# Altium PCB MungBeanSprout_Pcb.PcbDoc
Units mil, origin at the board's own origin, x right, y up, seen from the top; angles counter-clockwise.
Board outline 600 x 708.66 mil, 2 copper layers (Top Layer, Bottom Layer); 14 components, 20 nets, 59 pads, 11 vias.
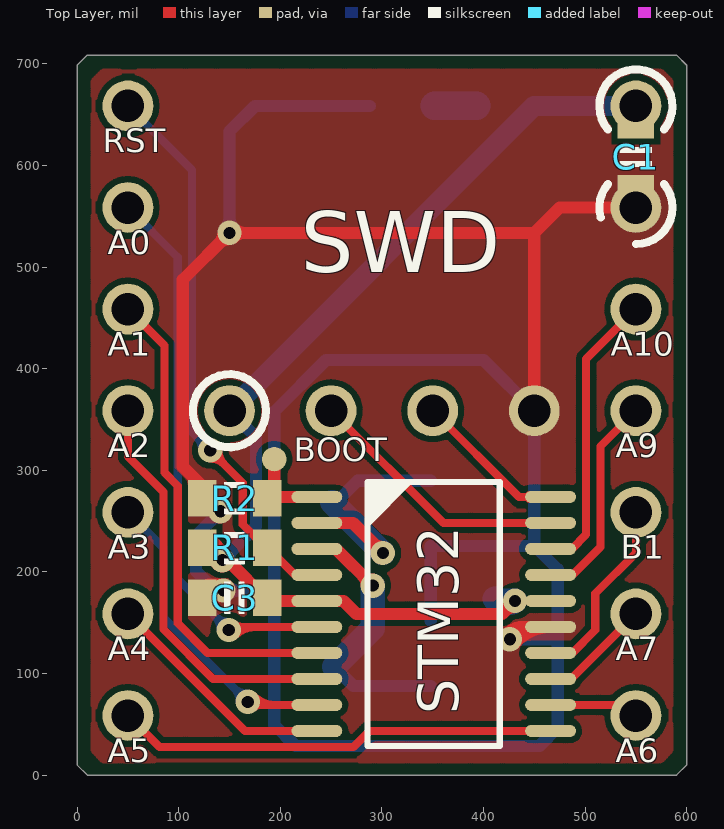
[diagram p0: Top Layer view]
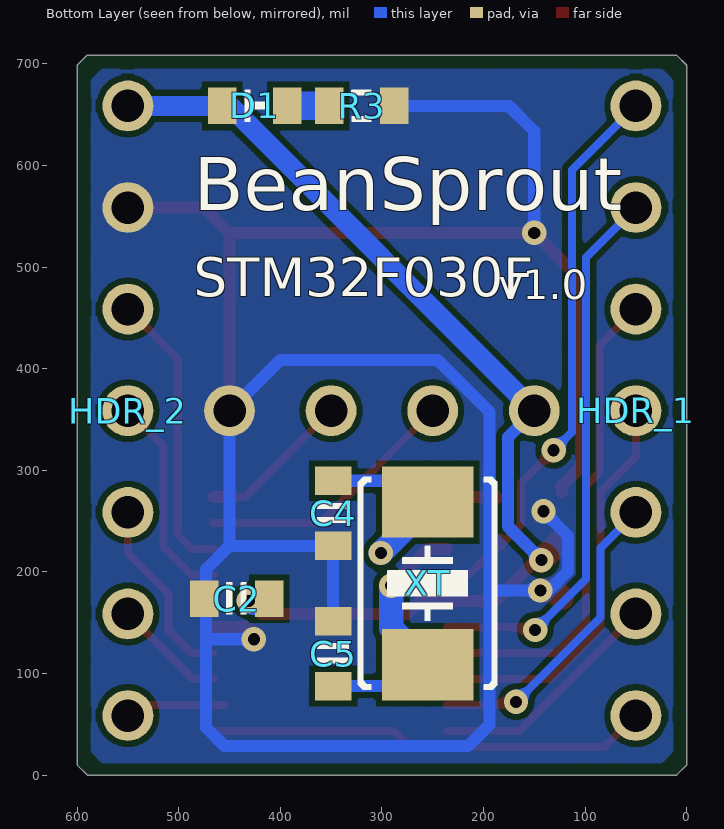
[diagram p1: Bottom Layer view, seen from below]
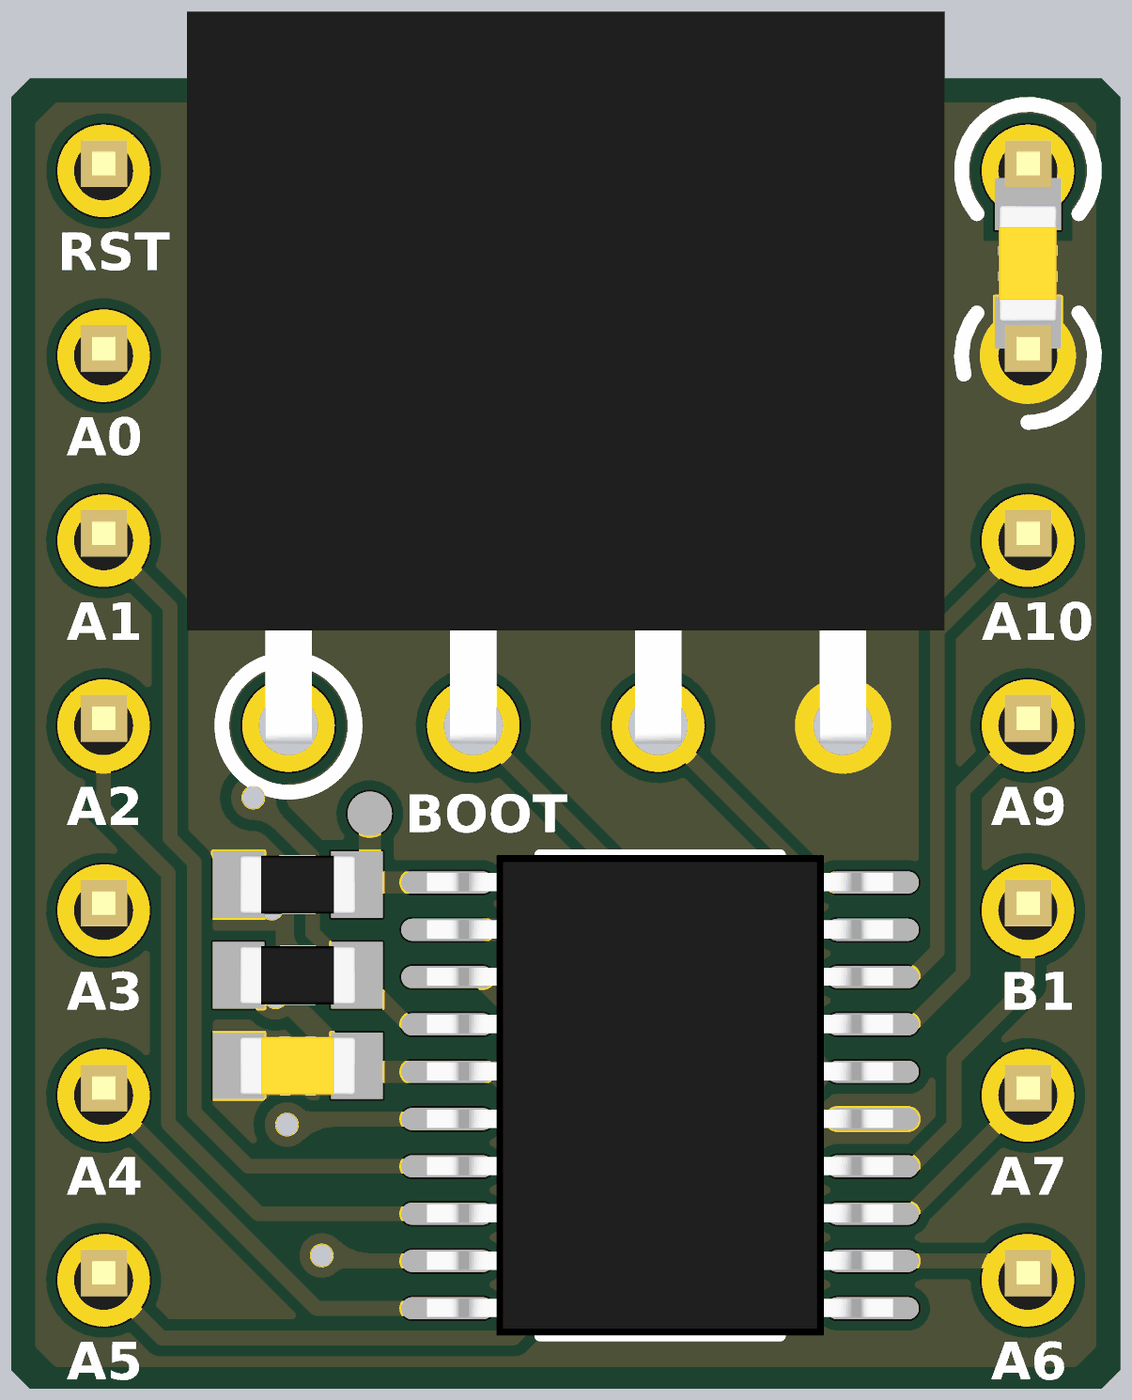
[diagram p2: 3D render of the assembled board from above, using the file's embedded part models]
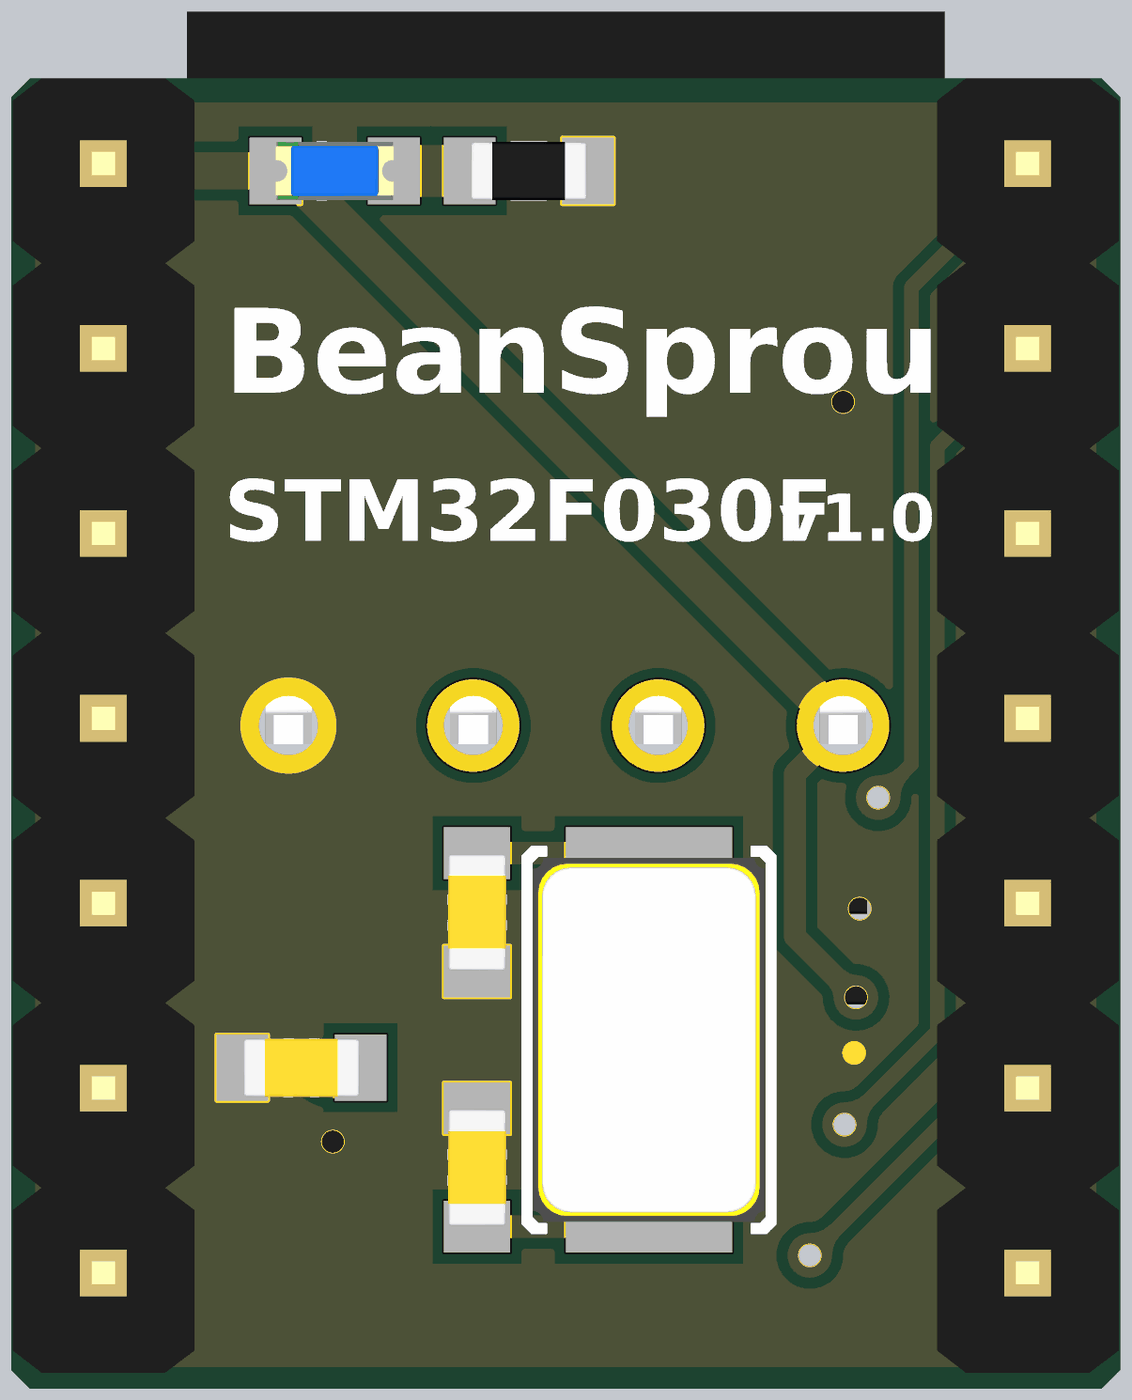
[diagram p3: 3D render of the assembled board from below, using the file's embedded part models]

## Layer stack, top to bottom
Top Solder: solder mask 0.4, Solder Resist, Dk 3.5
Top Layer: signal copper 1.4
Dielectric1: dielectric 12.6, FR-4, Dk 4.8
Bottom Layer: signal copper 1.4
Bottom Solder: solder mask 0.4, Solder Resist, Dk 3.5

## Board outline
0,10 10,0 590,0 600,10 600,698.66 590,708.66 10,708.66 0,698.66

## Design rules (kind name [scope] priority, off if disabled: settings)
Clearance ClearancePolygon [InPolygon] p1: gap=6
Clearance [All] p2: gap=6
ComponentClearance [All] p1: gap=0 collisioncheckmode=3 verticalgap=0 showdistances=FALSE
Height [All] p1: minheight=0 maxheight=5000 prefheight=500
HoleSize [All] p1: absolutevalues=TRUE maxlimit=200 minlimit=1 maxpercent=80.000 minpercent=20.000
HoleToHoleClearance [All] p1: gap=6 allowstackedmicrovias=TRUE
MinimumSolderMaskSliver [All] p1: minsoldermaskwidth=6
PlaneConnect [All] p1: planeconnectstyle=Direct reliefexpansion=20 reliefentries=4 reliefconductorwidth=20 reliefairgap=10
PolygonConnect [All] p1: connectstyle=Direct reliefconductorwidth=20 reliefentries=4 polygonreliefangle="90 Angle" airgapwidth=10
RoutingVias [All] p1: holewidth=12 width=20 viastyle="Through Hole" minholewidth=12 minwidth=20 maxholewidth=100 maxwidth=200
SilkToSilkClearance [All] p1: silktosilkclearance=0
SilkToSolderMaskClearance SilkscreenOverComponentPads [IsPad] p1: minsilkscreentomaskgap=1 clearancetoexposedcopper=TRUE
SolderMaskExpansion [All] p1: expansion=1
Width [All] p1: maxlimit=30 minlimit=6 preferedwidth=10
21 further rules are at their usual default settings.

## Classes and differential pairs
component class STM32F030F_Sch: C1 C2 C4 C5 D1 HDR_1 HDR_2 R1 R2 R3 STM32 SWD XT

## Components (designator, comment, footprint, x,y, rotation, side; value= is the part's Value field where it differs from the comment)
C1 "Cap_0603" CAP_0603 550,608.66 r270 top
C2 "Cap_0603" CAP_0603 443,173.66 r0 bottom
C3 "Cap_0603" CAP_0603 155,174.66 r180 top
C4 "Cap_0603" CAP_0603 348,257.66 r90 bottom locked
C5 "Cap_0603" CAP_0603 348,119.66 r270 bottom locked
D1 "LED_0603" LED_0603_BLUE 425,658.66 r180 bottom
HDR_1 "HDR1x7_2.54" HDR1X7_2.54_180 50,658.66 r180 bottom locked
HDR_2 "HDR1x7_2.54" HDR1X7_2.54_180 550,658.66 r180 bottom locked
R1 "Res_0603" RES_0603 155,223.66 r0 top locked
R2 "Res_0603" RES_0603 155,272.66 r0 top locked
R3 "Res_0603" RES_0603 320,658.66 r180 bottom
STM32 "STM32F030F" TSSOP_E170_P0.65_20 351,158.66 r0 top locked
SWD "HDR1x4_2.54" HDR1X4_2.54_90F 150,358.66 r90 top locked
XT "XTAL_5032_2P" XT_5032_2 255,188.66 r90 bottom locked

## Footprints (in the part's own frame and the unit in brackets; to place one, negate y for a bottom-side part, rotate by r counter-clockwise, add the part's x,y. Pads: shape width x height; smd on the part's side, far side on the other; paste and mask are expansions set on the pad)
CAP_0603 [mil]
  rect 28x36 smd: 1(-32,0) 2(32,0)
  silkscreen extent -10,-16 10,16, body extent -31,-16 32,16, height 36
HDR1X4_2.54_90F [mil]
  round 50 hole 32: 1(0,0) 2(0,-100) 3(0,-200) 4(0,-300)
  body extent -10,-355 386,55, height 99
HDR1X7_2.54_180 [mil]
  round 50 hole 32: 1(0,0) 2(0,-100) 3(0,-200) 4(0,-300) 5(0,-400) 6(0,-500) 7(0,-600)
  body extent -49,-650 49,50, height 323
LED_0603_BLUE [mil]
  rect 28x36 smd: 1(-32,0) 2(32,0)
  silkscreen extent -10,-16 10,16, body extent -32,-16 32,16, height 24
RES_0603 [mil]
  rect 28x36 smd: 1(-32,0) 2(32,0)
  silkscreen extent -10,-16 10,16, body extent -31,-16 32,16, height 20
TSSOP_E170_P0.65_20 [mil]
  oval 50x12 smd: 1(-115,115.16) 2(-115,89.57) 3(-115,63.98) 4(-115,38.39) 5(-115,12.8) 6(-115,-12.8) 7(-115,-38.39) 8(-115,-63.98) 9(-115,-89.57) 10(-115,-115.16) 11(115,-115.16) 12(115,-89.57) 13(115,-63.98) 14(115,-38.39) 15(115,-12.8) 16(115,12.8) 17(115,38.39) 18(115,63.98) 19(115,89.57) 20(115,115.16)
  silkscreen extent -65,-130 65,130, body extent -126,-130 126,130, height 42
XT_5032_2 [mil]
  rect 70x90 smd: 1(-80,0) 2(80,0)
  silkscreen extent -104,-68 104,68, body extent -98,-63 98,63, height 39

## Part data
C1 C2 C3 C4 C5: "Capacitor"
D1: "LED"
HDR_1: library part HDR1x7_2.54T, "Header"
HDR_2 SWD: "Header"
R1 R2 R3: "Resistor"
STM32: "MCU"
XT: "Crystal Oscillator"

## Free pads (board coordinates)
  round 24 smd: 0(194,311)

## Via types
v1: diameter 24, hole 12, Top Layer to Bottom Layer, 11 vias

## Nets (pads, with @x,y where several pads share a name; then routed paths per layer and width w, separated by ;. In a path a pad name is that pad's centre, name@x,y a point inside that pad or via, vN(x,y) a via of type N, cw(c..) or ccw(c..) an arc to the next point about the centre after c; other vN are vias at no path point)
3V3: C1.1 C2.1 C3.1 D1.1 HDR_2.1 R1.1 STM32.5 STM32.16 SWD.1 | length 1169.8
  Top Layer w12: R1.1@119,228.66 129,218.66 ccw(c135.75,225.41) v1@140.2,216.97 ; R1.1@120.81,226.85 ccw(c143,249.05) v1@143,217.66 ; v1@148,211.66 188.21,171.46 STM32.5 262.2,171.46 275,158.66 418.21,158.66 v1(431,171.46) ; v1@425,171.46 cw(c410.52,171.46) 420.76,161.22 cw(c431,150.97) v1@431,165.46
  Top Layer w24: R1.1@125.5,229.16 v1(143,211.66)
  Bottom Layer w12: v1(143,211.66) 176,244.66 176,332.66 SWD.1 ; v1@143,217.66 ccw(c143,232.15) 153.24,221.91 ccw(c163.49,211.66) v1@149,211.66
  Bottom Layer w20: SWD.1 450,658.66 HDR_2.1
  Bottom Layer w24: C2.1 ccw(c422.38,185.04) v1(431,171.46) 413.21,171.46 C2.1
BOOT: pad.0 R2.2 STM32.1 | length 89.1
  Top Layer w12: R2.2 R2.2@188.16,273.82 ; pad.0 194,279.66 R2.2@188.16,273.82 ; STM32.1 R2.2@188.16,273.82
GND: C1.2 C2.2 C3.2 C4.1 C5.1 HDR_2.2 R2.1 R3.2 STM32.15 SWD.4 | length 3000.2
  Top Layer w12: R2.1@123,278.66 123,284.66 104,303.66 104,487.66 v1(150,533.66) 450,533.66 ; v1@144,533.66 cw(c129.52,533.66) 139.76,523.42 cw(c150,513.18) v1@150,527.66 ; v1@154.24,529.42 cw(c164.49,519.18) 164.49,533.66 cw(c164.49,548.15) v1@154.24,537.9 ; v1@421.48,137.6 cw(c439.63,121.79) 439.63,145.87 ; v1(426,133.66) 438.21,145.87 STM32.15 ccw(c466,98.82) v1@430.53,129.72 ; v1@426,139.66 ccw(c426,154.15) 436.24,143.9 ccw(c446.49,133.66) v1@432,133.66 ; SWD.4 450,533.66 ; HDR_2.2 475,558.66 450,533.66
  Top Layer w24: C3.2 130,181.66 v1(144,181.66)
  Bottom Layer w12: v1@135,259.66 cw(c120.52,259.66) 130.76,249.42 cw(c141,239.18) v1@141,253.66 ; v1@139,178.66 117,200.66 117,235.66 v1(141,259.66) ; v1(144,181.66) 194,181.66 ; v1@145.76,537.9 ccw(c135.52,548.15) 150,548.15 ccw(c164.49,548.15) v1@154.24,537.9 ; v1@148.24,177.42 cw(c158.49,167.18) 158.49,181.66 cw(c158.49,196.15) v1@148.24,185.91 ; v1(150,533.66) 150,633.66 175,658.66 R3.2 ; C5.1 C4.1 450,225.66 ; v1(426,133.66) 473,133.66 ; v1@430.24,129.42 cw(c440.49,119.18) 440.49,133.66 cw(c440.49,148.15) v1@430.24,137.9 ; 450,225.66 473,202.66 473,46.66 455,28.66 215,28.66 194,49.66 194,357.66 245,408.66 400,408.66 SWD.4 450,225.66
NetC4_2: C4.2 STM32.2 XT.2 | length 276.4
  Top Layer w12: STM32.2 271.43,248.23 v1(301,218.66) ; v1@295,218.66 ccw(c280.52,218.66) 290.76,228.91 ccw(c301,239.15) v1@301,224.66
  Bottom Layer w12: XT.2@251,268.66 XT.2 276,289.66 C4.2
  Bottom Layer w24: XT.2@251,268.66 v1(301,218.66)
NetC5_2: C5.2 STM32.3 XT.1 | length 291.2
  Top Layer w12: STM32.3 254.87,222.64 v1(291,186.5) ; v1@285,186.5 ccw(c270.52,186.5) 280.76,196.75 ccw(c291,206.99) v1@291,192.5
  Bottom Layer w12: XT.1@253,106.66 272,87.66 C5.2
  Bottom Layer w24: XT.1@253,106.66 291,144.66 v1(291,186.5)
NetD1_2: D1.2 R3.1 | length 41
  Bottom Layer w28: R3.1 D1.2
PA0: HDR_1.2 STM32.6 | length 604.4
  Top Layer w8: v1@149.21,145.87 STM32.6 ; v1@154.86,137.21 cw(c175.76,116.31) 175.76,145.87 ; v1@154.86,148.52 ccw(c161.28,154.94) 161.28,145.87
  Bottom Layer w8: HDR_1.2 99,509.66 99,193.07 v1(149.21,142.87) ; v1@141.21,142.87 ccw(c121.89,142.87) 135.55,156.52 ccw(c149.21,170.18) v1@149.21,150.87
PA1: HDR_1.3 STM32.7 | length 478.5
  Top Layer w8: HDR_1.3 85.93,422.73 85.93,297.73 99,284.66 99,149.66 128.39,120.28 STM32.7
PA2: HDR_1.4 STM32.8 | length 400.9
  Top Layer w8: HDR_1.4 50,313.66 85,278.66 85,244.16 85,143.52 133.84,94.69 STM32.8
PA3: HDR_1.5 STM32.9 | length 365.4
  Top Layer w8: v1(168,72.1) 171,69.1 STM32.9 ; v1@173.66,66.44 cw(c180.07,60.02) 180.07,69.1 ; v1@173.66,77.75 ccw(c194.56,98.65) 194.56,69.1
  Bottom Layer w8: HDR_1.5 85,223.66 85,155.09 v1(168,72.1) ; v1@160,72.1 ccw(c140.69,72.1) 154.34,85.75 ccw(c168,99.41) v1@168,80.1
PA4: HDR_1.6 STM32.10 | length 233.7
  Top Layer w8: HDR_1.6 165.16,43.51 STM32.10
PA5: HDR_1.7 STM32.11 | length 435.5
  Top Layer w8: HDR_1.7 81.16,27.51 271.84,27.51 287.84,43.51 STM32.11
PA6: HDR_2.7 STM32.12 | length 99.3
  Top Layer w8: STM32.12@455,69.1 539.57,69.1 HDR_2.7
PA7: HDR_2.6 STM32.13 | length 110.5
  Top Layer w8: STM32.13 486.02,94.69 HDR_2.6
PA9: HDR_2.4 STM32.17 | length 227.3
  Top Layer w8: STM32.17@484.39,197.05 STM32.17 487.39,197.05 515,224.66 515,323.66 HDR_2.4
PA10: HDR_2.3 STM32.18 | length 283.1
  Top Layer w8: STM32.18 486.98,222.64 501,236.66 501,409.66 HDR_2.3
PB1: HDR_2.5 STM32.14 | length 185.8
  Top Layer w8: STM32.14 487.62,120.28 510,142.66 510,178.66 550,218.66 HDR_2.5
RST: HDR_1.1 R1.2 STM32.4 | length 621.4
  Top Layer w8: v1@131,311.66 cw(c131,292.35) 144.66,306.01 cw(c158.31,319.66) v1@139,319.66 ; v1(131,319.66) 163,287.66 163,246.66 R1.2@187,222.66 ; R1.2@183,224.66 R1.2@183,233.66 ; R1.2@188,223.66 214.61,197.05 STM32.4
  Bottom Layer w8: HDR_1.1 113,595.66 113,337.66 v1(131,319.66) ; v1@123,319.66 ccw(c103.69,319.66) 117.34,333.32 ccw(c131,346.98) v1@131,327.66
SWCLK: STM32.20 SWD.3 | length 171.3
  Top Layer w8: SWD.3 434.84,273.82 STM32.20
  Top Layer w12: STM32.20@445.84,273.82 STM32.20
SWDIO: STM32.19 SWD.2 | length 261.7
  Top Layer w8: SWD.2 360.43,248.23 STM32.19

## Polygon pours and split planes (outlines as drawn)
GND on Top Layer "Mechanical 1-No Net" (hatched 90Degree grid 2 track 4, remove dead copper, pour order 13): 25,693.66 65,693.66 130,693.66 575,693.66 585,683.66 585,668.66 585,23.66 575,13.66 500,13.66 25,13.66 15,23.66 15,683.66
GND on Bottom Layer "Mechanical 1-No Net" (hatched 90Degree grid 2 track 4, remove dead copper, pour order 11): 25,693.66 65,693.66 130,693.66 575,693.66 585,683.66 585,668.66 585,23.66 575,13.66 500,13.66 25,13.66 15,23.66 15,683.66

## Silkscreen, mask and mechanical layers (free items; w line width, h text height)
Top Overlay:
  circle w8: c150,358.66 r36
  lines w8: 515.39,548.77 cw(c550,558.66) 522.42,581.8 ; 522.42,635.52 cw(c550,658.66) 577.58,635.52 ; 550,522.66 ccw(c550,558.66) 577.58,581.8
  text "RST" at 25,605 h40
  text "A0" at 30,505 h40
  text "A1" at 30,405 h40
  text "A10" at 525,405 h40
  text "A2" at 30,305 h40
  text "A9" at 530,305 h40
  text "BOOT" at 213,301 h40
  text "A3" at 30,205 h40
  text "B1" at 535,205 h40
  text "A4" at 30,105 h40
  text "A7" at 530,105 h40
  text "A5" at 30,5 h40
  text "A6" at 530,5 h40
Bottom Overlay:
  text "BeanSprout" at 485,538.66 h90
  text "v1.0" at 185,458.66 h50
  text "STM32F030F" at 485,458.66 h65
Mechanical 1:
  the board outline again, w2
Drill Drawing:
  text ".Legend" at 708.4,26 h60

## Dimensions
590,708.66 to 590,0 on Mechanical 13
0,698.66 to 600,698.66 on Mechanical 13